# Altium PCB ALio Embedded.PcbDoc (part 2 of 2)
Units mm, origin at the board's own origin, x right, y up, seen from the top; angles counter-clockwise.
Board outline 88.22 x 65.31 mm, 2 copper layers (Top Layer, Bottom Layer); 585 components, 0 nets, 3879 pads, 0 vias.
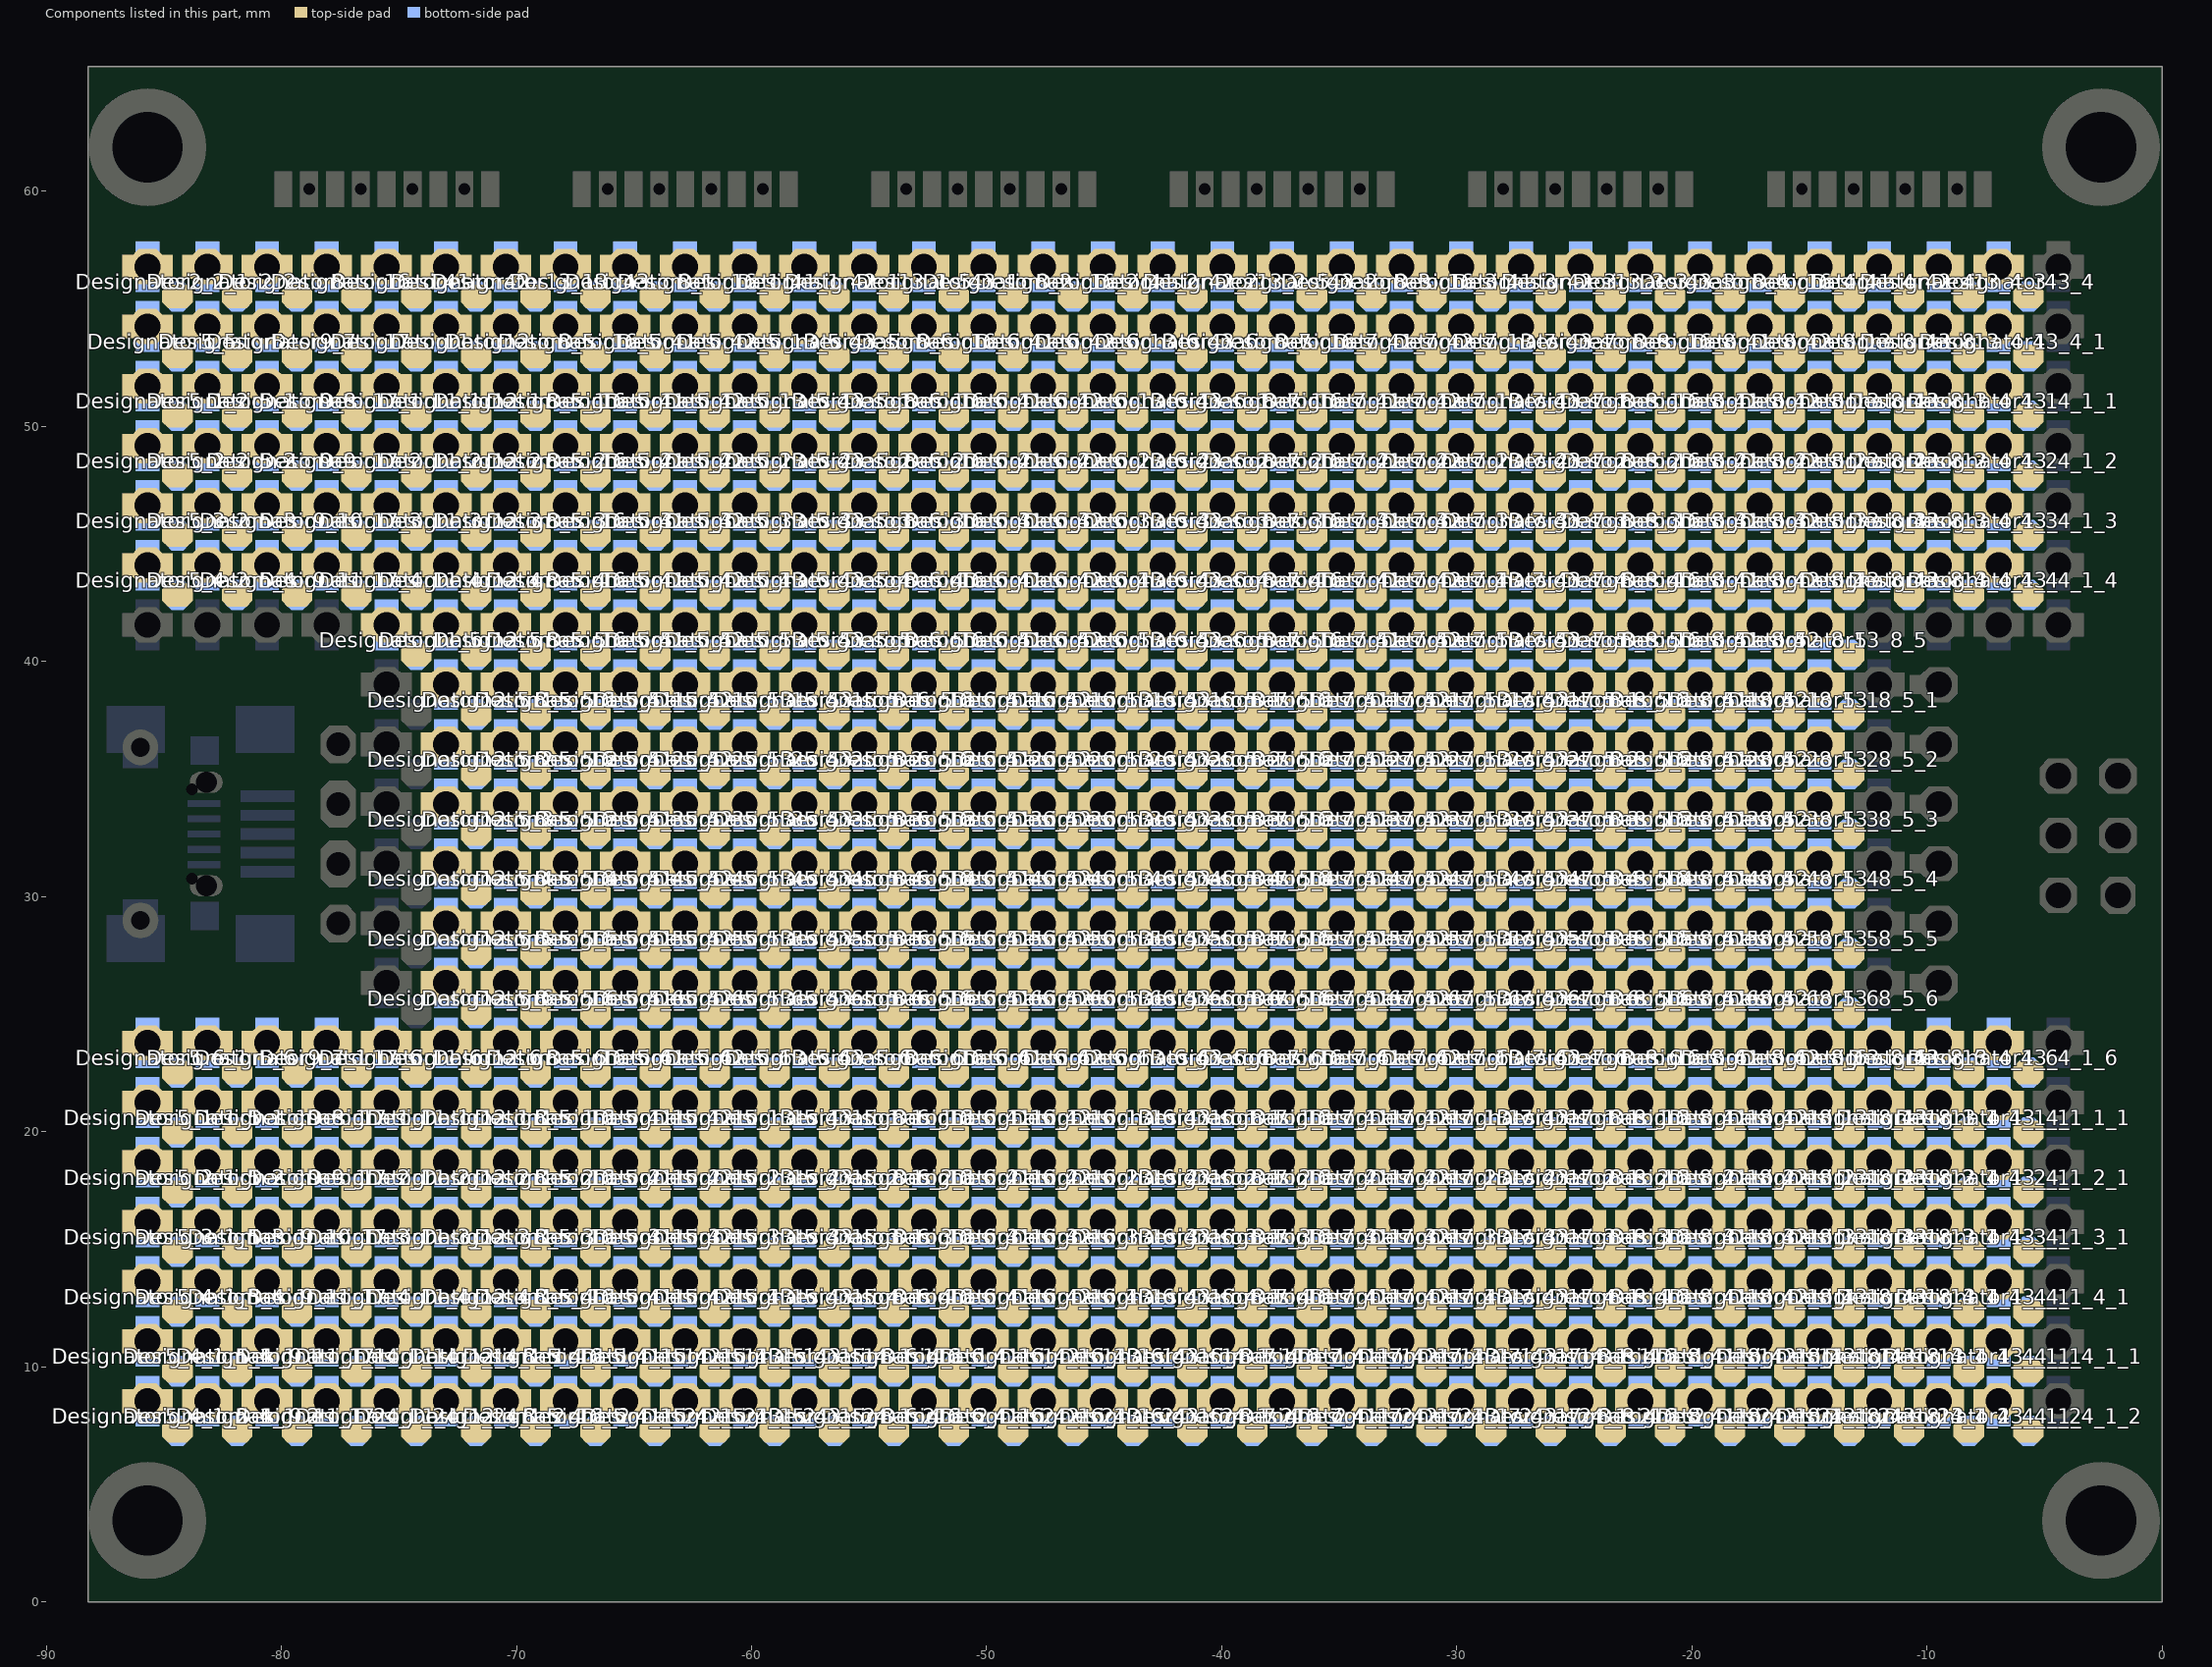
[diagram p2: the components of this part, seen from the top]

## Nets (pads, with @x,y where several pads share a name; then routed paths per layer and width w, separated by ;. In a path a pad name is that pad's centre, name@x,y a point inside that pad or via, vN(x,y) a via of type N, cw(c..) or ccw(c..) an arc to the next point about the centre after c; other vN are vias at no path point)
pads on no net: Designator2_2.1 Designator2_2.2 Designator2_2_1.1 Designator2_2_1.2 Designator5.1 Designator5.2 Designator5_1.1 Designator5_1.2 Designator5_1_1.1 Designator5_1_1.2 Designator5_1_1_1.1 Designator5_1_1_1.2 Designator5_1_2.1 Designator5_1_2.2 Designator5_2.1 Designator5_2.2 Designator5_2_1.1 Designator5_2_1.2 Designator5_2_1_1.1 Designator5_2_1_1.2 Designator5_2_2.1 Designator5_2_2.2 Designator5_3.1 Designator5_3.2 Designator5_3_1.1 Designator5_3_1.2 Designator5_3_1_1.1 Designator5_3_1_1.2 Designator5_3_2.1 Designator5_3_2.2 Designator5_4.1 Designator5_4.2 Designator5_4_1.1 Designator5_4_1.2 Designator5_4_1_1.1 Designator5_4_1_1.2 Designator5_4_1_1_1.1 Designator5_4_1_1_1.2 Designator5_4_1_2.1 Designator5_4_1_2.2 Designator5_4_1_2_1.1 Designator5_4_1_2_1.2 Designator5_4_1_3.1 Designator5_4_1_3.2 Designator5_4_2.1 Designator5_4_2.2 Designator5_5.1 Designator5_5.2 Designator5_6.1 Designator5_6.2 Designator5_6_1.1 Designator5_6_1.2 Designator8.1 Designator8.2 Designator8_1.1 Designator8_1.2 Designator8_2.1 Designator8_2.2 Designator8_3.1 Designator8_3.2 Designator8_4.1 Designator8_4.2 Designator8_5.1 Designator8_5.2 Designator8_5_1.1 Designator8_5_1.2 Designator8_5_1_1.1 Designator8_5_1_1.2 Designator8_5_2.1 Designator8_5_2.2 Designator8_5_2_1.1 Designator8_5_2_1.2 Designator8_5_3.1 Designator8_5_3.2 Designator8_5_3_1.1 Designator8_5_3_1.2 Designator8_5_4.1 Designator8_5_4.2 Designator8_5_4_1.1 Designator8_5_4_1.2 Designator8_5_4_1_1.1 Designator8_5_4_1_1.2 Designator8_5_4_1_2.1 Designator8_5_4_1_2.2 Designator8_5_5.1 Designator8_5_5.2 Designator8_5_5_1.1 Designator8_5_5_1.2 Designator8_5_5_2.1 Designator8_5_5_2.2 Designator8_5_5_3.1 Designator8_5_5_3.2 Designator8_5_5_4.1 Designator8_5_5_4.2 Designator8_5_5_5.1 Designator8_5_5_5.2 Designator8_5_5_6.1 Designator8_5_5_6.2 Designator8_5_6.1 Designator8_5_6.2 Designator8_6.1 Designator8_6.2 Designator8_6_1.1 Designator8_6_1.2 Designator8_6_1_1.1 Designator8_6_1_1.2 Designator8_6_2.1 Designator8_6_2.2 Designator8_6_2_1.1 Designator8_6_2_1.2 Designator8_6_3.1 Designator8_6_3.2 Designator8_6_3_1.1 Designator8_6_3_1.2 Designator8_6_4.1 Designator8_6_4.2 Designator8_6_4_1.1 Designator8_6_4_1.2 Designator8_6_4_1_1.1 Designator8_6_4_1_1.2 Designator8_6_4_1_2.1 Designator8_6_4_1_2.2 Designator8_6_5.1 Designator8_6_5.2 Designator8_6_5_1.1 Designator8_6_5_1.2 Designator8_6_5_2.1 Designator8_6_5_2.2 Designator8_6_5_3.1 Designator8_6_5_3.2 Designator8_6_5_4.1 Designator8_6_5_4.2 Designator8_6_5_5.1 Designator8_6_5_5.2 Designator8_6_5_6.1 Designator8_6_5_6.2 Designator8_6_6.1 Designator8_6_6.2 Designator8_7.1 Designator8_7.2 Designator8_7_1.1 Designator8_7_1.2 Designator8_7_1_1.1 Designator8_7_1_1.2 Designator8_7_2.1 Designator8_7_2.2 Designator8_7_2_1.1 Designator8_7_2_1.2 Designator8_7_3.1 Designator8_7_3.2 Designator8_7_3_1.1 Designator8_7_3_1.2 Designator8_7_4.1 Designator8_7_4.2 Designator8_7_4_1.1 Designator8_7_4_1.2 Designator8_7_4_1_1.1 Designator8_7_4_1_1.2 Designator8_7_4_1_2.1 Designator8_7_4_1_2.2 Designator8_7_5.1 Designator8_7_5.2 Designator8_7_5_1.1 Designator8_7_5_1.2 Designator8_7_5_2.1 Designator8_7_5_2.2 Designator8_7_5_3.1 Designator8_7_5_3.2 Designator8_7_5_4.1 Designator8_7_5_4.2 Designator8_7_5_5.1 Designator8_7_5_5.2 Designator8_7_5_6.1 Designator8_7_5_6.2 Designator8_7_6.1 Designator8_7_6.2 Designator8_8.1 Designator8_8.2 Designator8_8_1.1 Designator8_8_1.2 Designator8_8_1_1.1 Designator8_8_1_1.2 Designator8_8_2.1 Designator8_8_2.2 Designator8_8_2_1.1 Designator8_8_2_1.2 Designator8_8_3.1 Designator8_8_3.2 Designator8_8_3_1.1 Designator8_8_3_1.2 Designator8_8_4.1 Designator8_8_4.2 Designator8_8_4_1.1 Designator8_8_4_1.2 Designator8_8_4_1_1.1 Designator8_8_4_1_1.2 Designator8_8_4_1_2.1 Designator8_8_4_1_2.2 Designator8_8_5.1 Designator8_8_5.2 Designator8_8_5_1.1 Designator8_8_5_1.2 Designator8_8_5_2.1 Designator8_8_5_2.2 Designator8_8_5_3.1 Designator8_8_5_3.2 Designator8_8_5_4.1 Designator8_8_5_4.2 Designator8_8_5_5.1 Designator8_8_5_5.2 Designator8_8_5_6.1 Designator8_8_5_6.2 Designator8_8_6.1 Designator8_8_6.2 Designator9_7.1 Designator9_7.2 Designator9_7_1.1 Designator9_7_1.2 Designator9_8.1 Designator9_8.2 Designator9_8_1.1 Designator9_8_1.2 Designator9_9.1 Designator9_9.2 Designator9_9_1.1 Designator9_9_1.2 Designator9_10.1 Designator9_10.2 Designator9_10_1.1 Designator9_10_1.2 Designator9_11.1 Designator9_11.2 Designator9_11_1.1 Designator9_11_1.2 Designator9_11_1_1.1 Designator9_11_1_1.2 Designator9_11_1_2.1 Designator9_11_1_2.2 Designator11.1 Designator11.2 Designator11_1.1 Designator11_1.2 Designator11_1_1.1 Designator11_1_1.2 Designator11_2.1 Designator11_2.2 Designator11_2_1.1 Designator11_2_1.2 Designator11_3.1 Designator11_3.2 Designator11_3_1.1 Designator11_3_1.2 Designator11_4.1 Designator11_4.2 Designator11_4_1.1 Designator11_4_1.2 Designator11_4_1_1.1 Designator11_4_1_1.2 Designator11_4_1_2.1 Designator11_4_1_2.2 Designator11_5.1 Designator11_5.2 Designator11_6.1 Designator11_6.2 Designator12.1 Designator12.2 Designator12_1.1 Designator12_1.2 Designator12_1_1.1 Designator12_1_1.2 Designator12_2.1 Designator12_2.2 Designator12_2_1.1 Designator12_2_1.2 Designator12_3.1 Designator12_3.2 Designator12_3_1.1 Designator12_3_1.2 Designator12_4.1 Designator12_4.2 Designator12_4_1.1 Designator12_4_1.2 Designator12_4_1_1.1 Designator12_4_1_1.2 Designator12_4_1_2.1 Designator12_4_1_2.2 Designator12_5.1 Designator12_5.2 Designator12_5_1.1 Designator12_5_1.2 Designator12_5_2.1 Designator12_5_2.2 Designator12_5_3.1 Designator12_5_3.2 Designator12_5_4.1 Designator12_5_4.2 Designator12_5_5.1 Designator12_5_5.2 Designator12_5_6.1 Designator12_5_6.2 Designator12_6.1 Designator12_6.2 Designator13_1_5.1 Designator13_1_5.2 Designator13_2_5.1 Designator13_2_5.2 Designator13_3_3.1 Designator13_3_3.2 Designator13_4_1.1 Designator13_4_1.2 Designator13_4_1_1.1 Designator13_4_1_1.2 Designator13_4_1_1_1.1 Designator13_4_1_1_1.2 Designator13_4_1_2.1 Designator13_4_1_2.2 Designator13_4_1_2_1.1 Designator13_4_1_2_1.2 Designator13_4_1_3.1 Designator13_4_1_3.2 Designator13_4_1_3_1.1 Designator13_4_1_3_1.2 Designator13_4_1_4.1 Designator13_4_1_4.2 Designator13_4_1_4_1.1 Designator13_4_1_4_1.2 Designator13_4_1_4_1_1.1 Designator13_4_1_4_1_1.2 Designator13_4_1_4_1_2.1 Designator13_4_1_4_1_2.2 Designator13_4_1_6.1 Designator13_4_1_6.2 Designator13_4_3.1 Designator13_4_3.2 Designator13_5.1 Designator13_5.2 Designator13_5_1.1 Designator13_5_1.2 Designator13_5_1_1.1 Designator13_5_1_1.2 Designator13_5_2.1 Designator13_5_2.2 Designator13_5_2_1.1 Designator13_5_2_1.2 Designator13_5_3.1 Designator13_5_3.2 Designator13_5_3_1.1 Designator13_5_3_1.2 Designator13_5_4.1 Designator13_5_4.2 Designator13_5_4_1.1 Designator13_5_4_1.2 Designator13_5_4_1_1.1 Designator13_5_4_1_1.2 Designator13_5_4_1_2.1 Designator13_5_4_1_2.2 Designator13_5_5.1 Designator13_5_5.2 Designator13_5_5_1.1 Designator13_5_5_1.2 Designator13_5_5_2.1 Designator13_5_5_2.2 Designator13_5_5_3.1 Designator13_5_5_3.2 Designator13_5_5_4.1 Designator13_5_5_4.2 Designator13_5_5_5.1 Designator13_5_5_5.2 Designator13_5_5_6.1 Designator13_5_5_6.2 Designator13_5_6.1 Designator13_5_6.2 Designator13_6.1 Designator13_6.2 Designator13_6_1.1 Designator13_6_1.2 Designator13_6_1_1.1 Designator13_6_1_1.2 Designator13_6_2.1 Designator13_6_2.2 Designator13_6_2_1.1 Designator13_6_2_1.2 Designator13_6_3.1 Designator13_6_3.2 Designator13_6_3_1.1 Designator13_6_3_1.2 Designator13_6_4.1 Designator13_6_4.2 Designator13_6_4_1.1 Designator13_6_4_1.2 Designator13_6_4_1_1.1 Designator13_6_4_1_1.2 Designator13_6_4_1_2.1 Designator13_6_4_1_2.2 Designator13_6_5.1 Designator13_6_5.2 Designator13_6_5_1.1 Designator13_6_5_1.2 Designator13_6_5_2.1 Designator13_6_5_2.2 Designator13_6_5_3.1 Designator13_6_5_3.2 Designator13_6_5_4.1 Designator13_6_5_4.2 Designator13_6_5_5.1 Designator13_6_5_5.2 Designator13_6_5_6.1 Designator13_6_5_6.2 Designator13_6_6.1 Designator13_6_6.2 Designator13_7.1 Designator13_7.2 Designator13_7_1.1 Designator13_7_1.2 Designator13_7_1_1.1 Designator13_7_1_1.2 Designator13_7_2.1 Designator13_7_2.2 Designator13_7_2_1.1 Designator13_7_2_1.2 Designator13_7_3.1 Designator13_7_3.2 Designator13_7_3_1.1 Designator13_7_3_1.2 Designator13_7_4.1 Designator13_7_4.2 Designator13_7_4_1.1 Designator13_7_4_1.2 Designator13_7_4_1_1.1 Designator13_7_4_1_1.2 Designator13_7_4_1_2.1 Designator13_7_4_1_2.2 Designator13_7_5.1 Designator13_7_5.2 Designator13_7_5_1.1 Designator13_7_5_1.2 Designator13_7_5_2.1 Designator13_7_5_2.2 Designator13_7_5_3.1 Designator13_7_5_3.2 Designator13_7_5_4.1 Designator13_7_5_4.2 Designator13_7_5_5.1 Designator13_7_5_5.2 Designator13_7_5_6.1 Designator13_7_5_6.2 Designator13_7_6.1 Designator13_7_6.2 Designator13_8.1 Designator13_8.2 Designator13_8_1.1 Designator13_8_1.2 Designator13_8_1_1.1 Designator13_8_1_1.2 Designator13_8_2.1 Designator13_8_2.2 Designator13_8_2_1.1 Designator13_8_2_1.2 Designator13_8_3.1 Designator13_8_3.2 Designator13_8_3_1.1 Designator13_8_3_1.2 Designator13_8_4.1 Designator13_8_4.2 Designator13_8_4_1.1 Designator13_8_4_1.2 Designator13_8_4_1_1.1 Designator13_8_4_1_1.2 Designator13_8_4_1_2.1 Designator13_8_4_1_2.2 Designator13_8_5.1 Designator13_8_5.2 Designator13_8_5_1.1 Designator13_8_5_1.2 Designator13_8_5_2.1 Designator13_8_5_2.2 Designator13_8_5_3.1 Designator13_8_5_3.2 Designator13_8_5_4.1 Designator13_8_5_4.2 Designator13_8_5_5.1 Designator13_8_5_5.2 Designator13_8_5_6.1 Designator13_8_5_6.2 Designator13_8_6.1 Designator13_8_6.2 Designator13_13.1 Designator13_13.2 Designator16.1 Designator16.2 Designator16_1.1 Designator16_1.2 Designator16_2.1 Designator16_2.2 Designator16_3.1 Designator16_3.2 Designator16_4.1 Designator16_4.2 Designator16_5.1 Designator16_5.2 Designator16_5_1.1 Designator16_5_1.2 Designator16_5_1_1.1 Designator16_5_1_1.2 Designator16_5_2.1 Designator16_5_2.2 Designator16_5_2_1.1 Designator16_5_2_1.2 Designator16_5_3.1 Designator16_5_3.2 Designator16_5_3_1.1 Designator16_5_3_1.2 Designator16_5_4.1 Designator16_5_4.2 Designator16_5_4_1.1 Designator16_5_4_1.2 Designator16_5_4_1_1.1 Designator16_5_4_1_1.2 Designator16_5_4_1_2.1 Designator16_5_4_1_2.2 Designator16_5_5.1 Designator16_5_5.2 Designator16_5_5_1.1 Designator16_5_5_1.2 Designator16_5_5_2.1 Designator16_5_5_2.2 Designator16_5_5_3.1 Designator16_5_5_3.2 Designator16_5_5_4.1 Designator16_5_5_4.2 Designator16_5_5_5.1 Designator16_5_5_5.2 Designator16_5_5_6.1 Designator16_5_5_6.2 Designator16_5_6.1 Designator16_5_6.2 Designator16_6.1 Designator16_6.2 Designator16_6_1.1 Designator16_6_1.2 Designator16_6_1_1.1 Designator16_6_1_1.2 Designator16_6_2.1 Designator16_6_2.2 Designator16_6_2_1.1 Designator16_6_2_1.2 Designator16_6_3.1 Designator16_6_3.2 Designator16_6_3_1.1 Designator16_6_3_1.2 Designator16_6_4.1 Designator16_6_4.2 Designator16_6_4_1.1 Designator16_6_4_1.2 Designator16_6_4_1_1.1 Designator16_6_4_1_1.2 Designator16_6_4_1_2.1 Designator16_6_4_1_2.2 Designator16_6_5.1 Designator16_6_5.2 Designator16_6_5_1.1 Designator16_6_5_1.2 Designator16_6_5_2.1 Designator16_6_5_2.2 Designator16_6_5_3.1 Designator16_6_5_3.2 Designator16_6_5_4.1 Designator16_6_5_4.2 Designator16_6_5_5.1 Designator16_6_5_5.2 Designator16_6_5_6.1 Designator16_6_5_6.2 Designator16_6_6.1 Designator16_6_6.2 Designator16_7.1 Designator16_7.2 Designator16_7_1.1 Designator16_7_1.2 Designator16_7_1_1.1 Designator16_7_1_1.2 Designator16_7_2.1 Designator16_7_2.2 Designator16_7_2_1.1 Designator16_7_2_1.2 Designator16_7_3.1 Designator16_7_3.2 Designator16_7_3_1.1 Designator16_7_3_1.2 Designator16_7_4.1 Designator16_7_4.2 Designator16_7_4_1.1 Designator16_7_4_1.2 Designator16_7_4_1_1.1 Designator16_7_4_1_1.2 Designator16_7_4_1_2.1 Designator16_7_4_1_2.2 Designator16_7_5.1 Designator16_7_5.2 Designator16_7_5_1.1 Designator16_7_5_1.2 Designator16_7_5_2.1 Designator16_7_5_2.2 Designator16_7_5_3.1 Designator16_7_5_3.2 Designator16_7_5_4.1 Designator16_7_5_4.2 Designator16_7_5_5.1 Designator16_7_5_5.2 Designator16_7_5_6.1 Designator16_7_5_6.2 Designator16_7_6.1 Designator16_7_6.2 Designator16_8.1 Designator16_8.2 Designator16_8_1.1 Designator16_8_1.2 Designator16_8_1_1.1 Designator16_8_1_1.2 Designator16_8_2.1 Designator16_8_2.2 Designator16_8_2_1.1 Designator16_8_2_1.2 Designator16_8_3.1 Designator16_8_3.2 Designator16_8_3_1.1 Designator16_8_3_1.2 Designator16_8_4.1 Designator16_8_4.2 Designator16_8_4_1.1 Designator16_8_4_1.2 Designator16_8_4_1_1.1 Designator16_8_4_1_1.2 Designator16_8_4_1_2.1 Designator16_8_4_1_2.2 Designator16_8_5.1 Designator16_8_5.2 Designator16_8_5_1.1 Designator16_8_5_1.2 Designator16_8_5_2.1 Designator16_8_5_2.2 Designator16_8_5_3.1 Designator16_8_5_3.2 Designator16_8_5_4.1 Designator16_8_5_4.2 Designator16_8_5_5.1 Designator16_8_5_5.2 Designator16_8_5_6.1 Designator16_8_5_6.2 Designator16_8_6.1 Designator16_8_6.2 Designator17.1 Designator17.2 Designator17_1.1 Designator17_1.2 Designator17_1_1.1 Designator17_1_1.2 Designator17_2.1 Designator17_2.2 Designator17_2_1.1 Designator17_2_1.2 Designator17_3.1 Designator17_3.2 Designator17_3_1.1 Designator17_3_1.2 Designator17_4.1 Designator17_4.2 Designator17_4_1.1 Designator17_4_1.2 Designator17_4_1_1.1 Designator17_4_1_1.2 Designator17_4_1_2.1 Designator17_4_1_2.2 Designator17_6.1 Designator17_6.2 Designator41.1 Designator41.2 Designator41_1.1 Designator41_1.2 Designator41_2.1 Designator41_2.2 Designator41_3.1 Designator41_3.2 Designator41_4.1 Designator41_4.2 Designator41_5.1 Designator41_5.2 Designator41_5_1.1 Designator41_5_1.2 Designator41_5_1_1.1 Designator41_5_1_1.2 Designator41_5_2.1 Designator41_5_2.2 Designator41_5_2_1.1 Designator41_5_2_1.2 Designator41_5_3.1 Designator41_5_3.2 Designator41_5_3_1.1 Designator41_5_3_1.2 Designator41_5_4.1 Designator41_5_4.2 Designator41_5_4_1.1 Designator41_5_4_1.2 Designator41_5_4_1_1.1 Designator41_5_4_1_1.2 Designator41_5_4_1_2.1 Designator41_5_4_1_2.2 Designator41_5_5.1 Designator41_5_5.2 Designator41_5_5_1.1 Designator41_5_5_1.2 Designator41_5_5_2.1 Designator41_5_5_2.2 Designator41_5_5_3.1 Designator41_5_5_3.2 Designator41_5_5_4.1 Designator41_5_5_4.2 Designator41_5_5_5.1 Designator41_5_5_5.2 Designator41_5_5_6.1 Designator41_5_5_6.2 Designator41_5_6.1 Designator41_5_6.2 Designator41_6.1 Designator41_6.2 Designator41_6_1.1 Designator41_6_1.2 Designator41_6_1_1.1 Designator41_6_1_1.2 Designator41_6_2.1 Designator41_6_2.2 Designator41_6_2_1.1 Designator41_6_2_1.2 Designator41_6_3.1 Designator41_6_3.2 Designator41_6_3_1.1 Designator41_6_3_1.2 Designator41_6_4.1 Designator41_6_4.2 Designator41_6_4_1.1 Designator41_6_4_1.2 Designator41_6_4_1_1.1 Designator41_6_4_1_1.2 Designator41_6_4_1_2.1 Designator41_6_4_1_2.2 Designator41_6_5.1 Designator41_6_5.2 Designator41_6_5_1.1 Designator41_6_5_1.2 Designator41_6_5_2.1 Designator41_6_5_2.2 Designator41_6_5_3.1 Designator41_6_5_3.2 Designator41_6_5_4.1 Designator41_6_5_4.2 Designator41_6_5_5.1 Designator41_6_5_5.2 Designator41_6_5_6.1 Designator41_6_5_6.2 Designator41_6_6.1 Designator41_6_6.2 Designator41_7.1 Designator41_7.2 Designator41_7_1.1 Designator41_7_1.2 Designator41_7_1_1.1 Designator41_7_1_1.2 Designator41_7_2.1 Designator41_7_2.2 Designator41_7_2_1.1 Designator41_7_2_1.2 Designator41_7_3.1 Designator41_7_3.2 Designator41_7_3_1.1 Designator41_7_3_1.2 Designator41_7_4.1 Designator41_7_4.2 Designator41_7_4_1.1 Designator41_7_4_1.2 Designator41_7_4_1_1.1 Designator41_7_4_1_1.2 Designator41_7_4_1_2.1 Designator41_7_4_1_2.2 Designator41_7_5.1 Designator41_7_5.2 Designator41_7_5_1.1 Designator41_7_5_1.2 Designator41_7_5_2.1 Designator41_7_5_2.2 Designator41_7_5_3.1 Designator41_7_5_3.2 Designator41_7_5_4.1 Designator41_7_5_4.2 Designator41_7_5_5.1 Designator41_7_5_5.2 Designator41_7_5_6.1 Designator41_7_5_6.2 Designator41_7_6.1 Designator41_7_6.2 Designator41_8.1 Designator41_8.2 Designator41_8_1.1 Designator41_8_1.2 Designator41_8_1_1.1 Designator41_8_1_1.2 Designator41_8_2.1 Designator41_8_2.2 Designator41_8_2_1.1 Designator41_8_2_1.2 Designator41_8_3.1 Designator41_8_3.2 Designator41_8_3_1.1 Designator41_8_3_1.2 Designator41_8_4.1 Designator41_8_4.2 Designator41_8_4_1.1 Designator41_8_4_1.2 Designator41_8_4_1_1.1 Designator41_8_4_1_1.2 Designator41_8_4_1_2.1 Designator41_8_4_1_2.2 Designator41_8_5.1 Designator41_8_5.2 Designator41_8_5_1.1 Designator41_8_5_1.2 Designator41_8_5_2.1 Designator41_8_5_2.2 Designator41_8_5_3.1 Designator41_8_5_3.2 Designator41_8_5_4.1 Designator41_8_5_4.2 Designator41_8_5_5.1 Designator41_8_5_5.2 Designator41_8_5_6.1 Designator41_8_5_6.2 Designator41_8_6.1 Designator41_8_6.2 Designator42.1 Designator42.2 Designator42_1.1 Designator42_1.2 Designator42_2.1 Designator42_2.2 Designator42_3.1 Designator42_3.2 Designator42_4.1 Designator42_4.2 Designator42_5.1 Designator42_5.2 Designator42_5_1.1 Designator42_5_1.2 Designator42_5_1_1.1 Designator42_5_1_1.2 Designator42_5_2.1 Designator42_5_2.2 Designator42_5_2_1.1 Designator42_5_2_1.2 Designator42_5_3.1 Designator42_5_3.2 Designator42_5_3_1.1 Designator42_5_3_1.2 Designator42_5_4.1 Designator42_5_4.2 Designator42_5_4_1.1 Designator42_5_4_1.2 Designator42_5_4_1_1.1 Designator42_5_4_1_1.2 Designator42_5_4_1_2.1 Designator42_5_4_1_2.2 Designator42_5_5.1 Designator42_5_5.2 Designator42_5_5_1.1 Designator42_5_5_1.2 Designator42_5_5_2.1 Designator42_5_5_2.2 Designator42_5_5_3.1 Designator42_5_5_3.2 Designator42_5_5_4.1 Designator42_5_5_4.2 Designator42_5_5_5.1 Designator42_5_5_5.2 Designator42_5_5_6.1 Designator42_5_5_6.2 Designator42_5_6.1 Designator42_5_6.2 Designator42_6.1 Designator42_6.2 Designator42_6_1.1 Designator42_6_1.2 Designator42_6_1_1.1 Designator42_6_1_1.2 Designator42_6_2.1 Designator42_6_2.2 Designator42_6_2_1.1 Designator42_6_2_1.2 Designator42_6_3.1 Designator42_6_3.2 Designator42_6_3_1.1 Designator42_6_3_1.2 Designator42_6_4.1 Designator42_6_4.2 Designator42_6_4_1.1 Designator42_6_4_1.2 Designator42_6_4_1_1.1 Designator42_6_4_1_1.2 Designator42_6_4_1_2.1 Designator42_6_4_1_2.2 Designator42_6_5.1 Designator42_6_5.2 Designator42_6_5_1.1 Designator42_6_5_1.2 Designator42_6_5_2.1 Designator42_6_5_2.2 Designator42_6_5_3.1 Designator42_6_5_3.2 Designator42_6_5_4.1 Designator42_6_5_4.2 Designator42_6_5_5.1 Designator42_6_5_5.2 Designator42_6_5_6.1 Designator42_6_5_6.2 Designator42_6_6.1 Designator42_6_6.2 Designator42_7.1 Designator42_7.2 Designator42_7_1.1 Designator42_7_1.2 Designator42_7_1_1.1 Designator42_7_1_1.2 Designator42_7_2.1 Designator42_7_2.2 Designator42_7_2_1.1 Designator42_7_2_1.2 Designator42_7_3.1 Designator42_7_3.2 Designator42_7_3_1.1 Designator42_7_3_1.2 Designator42_7_4.1 Designator42_7_4.2 Designator42_7_4_1.1 Designator42_7_4_1.2 Designator42_7_4_1_1.1 Designator42_7_4_1_1.2 Designator42_7_4_1_2.1 Designator42_7_4_1_2.2 Designator42_7_5.1 Designator42_7_5.2 Designator42_7_5_1.1 Designator42_7_5_1.2 Designator42_7_5_2.1 Designator42_7_5_2.2 Designator42_7_5_3.1 Designator42_7_5_3.2 Designator42_7_5_4.1 Designator42_7_5_4.2 Designator42_7_5_5.1 Designator42_7_5_5.2 Designator42_7_5_6.1 Designator42_7_5_6.2 Designator42_7_6.1 Designator42_7_6.2 Designator42_8.1 Designator42_8.2 Designator42_8_1.1 Designator42_8_1.2 Designator42_8_1_1.1 Designator42_8_1_1.2 Designator42_8_2.1 Designator42_8_2.2 Designator42_8_2_1.1 Designator42_8_2_1.2 Designator42_8_3.1 Designator42_8_3.2 Designator42_8_3_1.1 Designator42_8_3_1.2 Designator42_8_4.1 Designator42_8_4.2 Designator42_8_4_1.1 Designator42_8_4_1.2 Designator42_8_4_1_1.1 Designator42_8_4_1_1.2 Designator42_8_4_1_2.1 Designator42_8_4_1_2.2 Designator42_8_5.1 Designator42_8_5.2 Designator42_8_5_1.1 Designator42_8_5_1.2 Designator42_8_5_2.1 Designator42_8_5_2.2 Designator42_8_5_3.1 Designator42_8_5_3.2 Designator42_8_5_4.1 Designator42_8_5_4.2 Designator42_8_5_5.1 Designator42_8_5_5.2 Designator42_8_5_6.1 Designator42_8_5_6.2 Designator42_8_6.1 Designator42_8_6.2 Designator43.1 Designator43.2 Designator43_1.1 Designator43_1.2 Designator43_2.1 Designator43_2.2 Designator43_3.1 Designator43_3.2 Designator43_4.1 Designator43_4.2 Designator43_4_1.1 Designator43_4_1.2 Designator43_4_1_1.1 Designator43_4_1_1.2 Designator43_4_1_1_1.1 Designator43_4_1_1_1.2 Designator43_4_1_2.1 Designator43_4_1_2.2 Designator43_4_1_2_1.1 Designator43_4_1_2_1.2 Designator43_4_1_3.1 Designator43_4_1_3.2 Designator43_4_1_3_1.1 Designator43_4_1_3_1.2 Designator43_4_1_4.1 Designator43_4_1_4.2 Designator43_4_1_4_1.1 Designator43_4_1_4_1.2 Designator43_4_1_4_1_1.1 Designator43_4_1_4_1_1.2 Designator43_4_1_4_1_2.1 Designator43_4_1_4_1_2.2 Designator43_4_1_6.1 Designator43_4_1_6.2 Designator43_5.1 Designator43_5.2 Designator43_5_1.1 Designator43_5_1.2 Designator43_5_1_1.1 Designator43_5_1_1.2 Designator43_5_2.1 Designator43_5_2.2 Designator43_5_2_1.1 Designator43_5_2_1.2 Designator43_5_3.1 Designator43_5_3.2 Designator43_5_3_1.1 Designator43_5_3_1.2 Designator43_5_4.1 Designator43_5_4.2 Designator43_5_4_1.1 Designator43_5_4_1.2 Designator43_5_4_1_1.1 Designator43_5_4_1_1.2 Designator43_5_4_1_2.1 Designator43_5_4_1_2.2 Designator43_5_5.1 Designator43_5_5.2 Designator43_5_5_1.1 Designator43_5_5_1.2 Designator43_5_5_2.1 Designator43_5_5_2.2 Designator43_5_5_3.1 Designator43_5_5_3.2 Designator43_5_5_4.1 Designator43_5_5_4.2 Designator43_5_5_5.1 Designator43_5_5_5.2 Designator43_5_5_6.1 Designator43_5_5_6.2 Designator43_5_6.1 Designator43_5_6.2 Designator43_6.1 Designator43_6.2 Designator43_6_1.1 Designator43_6_1.2 Designator43_6_1_1.1 Designator43_6_1_1.2 Designator43_6_2.1 Designator43_6_2.2 Designator43_6_2_1.1 Designator43_6_2_1.2 Designator43_6_3.1 Designator43_6_3.2 Designator43_6_3_1.1 Designator43_6_3_1.2 Designator43_6_4.1 Designator43_6_4.2 Designator43_6_4_1.1 Designator43_6_4_1.2 Designator43_6_4_1_1.1 Designator43_6_4_1_1.2 Designator43_6_4_1_2.1 Designator43_6_4_1_2.2 Designator43_6_5.1 Designator43_6_5.2 Designator43_6_5_1.1 Designator43_6_5_1.2 Designator43_6_5_2.1 Designator43_6_5_2.2 Designator43_6_5_3.1 Designator43_6_5_3.2 Designator43_6_5_4.1 Designator43_6_5_4.2 Designator43_6_5_5.1 Designator43_6_5_5.2 Designator43_6_5_6.1 Designator43_6_5_6.2 Designator43_6_6.1 Designator43_6_6.2 Designator43_7.1 Designator43_7.2 Designator43_7_1.1 Designator43_7_1.2 Designator43_7_1_1.1 Designator43_7_1_1.2 Designator43_7_2.1 Designator43_7_2.2 Designator43_7_2_1.1 Designator43_7_2_1.2 Designator43_7_3.1 Designator43_7_3.2 Designator43_7_3_1.1 Designator43_7_3_1.2 Designator43_7_4.1 Designator43_7_4.2 Designator43_7_4_1.1 Designator43_7_4_1.2 Designator43_7_4_1_1.1 Designator43_7_4_1_1.2 Designator43_7_4_1_2.1 Designator43_7_4_1_2.2 Designator43_7_5.1 Designator43_7_5.2 Designator43_7_5_1.1 Designator43_7_5_1.2 Designator43_7_5_2.1 Designator43_7_5_2.2 Designator43_7_5_3.1 Designator43_7_5_3.2 Designator43_7_5_4.1 Designator43_7_5_4.2 Designator43_7_5_5.1 Designator43_7_5_5.2 Designator43_7_5_6.1 Designator43_7_5_6.2 Designator43_7_6.1 Designator43_7_6.2 Designator43_8.1 Designator43_8.2 Designator43_8_1.1 Designator43_8_1.2 Designator43_8_1_1.1 Designator43_8_1_1.2 Designator43_8_2.1 Designator43_8_2.2 Designator43_8_2_1.1 Designator43_8_2_1.2 Designator43_8_3.1 Designator43_8_3.2 Designator43_8_3_1.1 Designator43_8_3_1.2 Designator43_8_4.1 Designator43_8_4.2 Designator43_8_4_1.1 Designator43_8_4_1.2 Designator43_8_4_1_1.1 Designator43_8_4_1_1.2 Designator43_8_4_1_2.1 Designator43_8_4_1_2.2 Designator43_8_6.1 Designator43_8_6.2
copper on no net: | length 408.4
  Top Layer w0.254: -80.615,56.8 -80.615,59.431 -79.946,60.1 ; -78.075,56.8 -77.746,57.129 -77.746,60.1 ; -75.535,56.8 -75.535,60.089 ; -75.529,60.1 -75.518,60.089 ; -73.346,57.151 -72.995,56.8 ; -73.324,57.129 -73.324,60.1 ; -71.124,60.1 -70.455,59.431 -70.455,56.8 ; -67.915,56.8 -67.915,59.431 -67.246,60.1 ; -65.375,56.8 -65.046,57.129 -65.046,60.1 ; -62.835,56.8 -62.835,60.089 ; -62.829,60.1 -62.818,60.089 ; -60.646,57.151 -60.295,56.8 ; -60.624,57.129 -60.624,60.1 ; -58.424,60.1 -57.755,59.431 -57.755,56.8 ; -55.215,56.8 -55.215,59.431 -54.546,60.1 ; -52.675,56.8 -52.346,57.129 -52.346,60.1 ; -50.135,56.8 -50.135,60.089 ; -50.129,60.1 -50.118,60.089 ; -47.946,57.151 -47.595,56.8 ; -47.924,57.129 -47.924,60.1 ; -45.724,60.1 -45.055,59.431 -45.055,56.8 ; -42.515,56.8 -42.515,59.431 -41.846,60.1 ; -39.975,56.8 -39.646,57.129 -39.646,60.1 ; -37.435,56.8 -37.435,60.089 ; -37.429,60.1 -37.418,60.089 ; -35.246,57.151 -34.895,56.8 ; -35.224,57.129 -35.224,60.1 ; -33.024,60.1 -32.355,59.431 -32.355,56.8 ; -29.815,56.8 -29.815,59.431 -29.146,60.1 ; -27.275,56.8 -26.946,57.129 -26.946,60.1 ; -24.735,56.8 -24.735,60.089 ; -24.729,60.1 -24.718,60.089 ; -22.546,57.151 -22.195,56.8 ; -22.524,57.129 -22.524,60.1 ; -20.324,60.1 -19.655,59.431 -19.655,56.8 ; -17.115,56.8 -17.115,59.431 -16.446,60.1 ; -14.575,56.8 -14.246,57.129 -14.246,60.1 ; -12.035,56.8 -12.035,60.089 ; -12.029,60.1 -12.018,60.089 ; -9.846,57.151 -9.495,56.8 ; -9.824,57.129 -9.824,60.1 ; -7.624,60.1 -6.955,59.431 -6.955,56.8
  Top Layer w0.33: -6.168,33.864 -3.145,33.864
  Top Layer w0.356: -3.145,33.864 -1.875,32.594
  Top Layer w0.381: -75.713,25.05 -74.692,25.05 ; -75.713,27.59 -74.692,27.59 ; -75.713,30.13 -74.692,30.13 ; -75.713,32.67 -74.692,32.67 ; -75.713,35.21 -74.692,35.21 ; -75.713,37.75 -74.692,37.75 ; -9.495,26.32 -2.739,26.32 -2.561,26.498 -1.875,27.184 -1.875,30.054 ; -9.495,28.86 -5.609,28.86 -4.415,30.054 ; -9.495,31.4 -6.828,31.4 -6.65,31.578 -5.634,32.594 -4.415,32.594 ; -9.495,33.94 -9.419,33.864 -6.168,33.864 ; -9.495,36.48 -5.761,36.48 -4.415,35.134 ; -9.495,39.02 -3.653,39.02 -2.713,38.08 -1.875,37.242 -1.875,35.134
  Bottom Layer w0.254: -83.301,31.36 -82.366,31.36 -82.063,31.057 -80.6,31.057 ; -83.301,32.01 -82.195,32.01 -82.074,31.889 -80.631,31.889 ; -83.301,32.66 -80.608,32.66 ; -83.301,33.31 -82.195,33.31 -82.074,33.431 -80.631,33.431 -80.6,33.463 ; -83.301,33.96 -82.366,33.96 -82.063,34.263 -80.6,34.263 -79.794,34.263 -77.578,36.478 ; -80.615,56.8 -80.615,59.431 -79.946,60.1 ; -80.6,31.063 -79.783,31.063 -77.578,28.858 ; -80.6,31.863 -78.043,31.863 -77.578,31.398 ; -80.6,32.663 -78.854,32.663 -77.578,33.938 ; -79.345,55.53 -79.345,58.07 -78.824,58.591 -78.824,60.1 ; -78.075,56.8 -77.724,57.151 ; -77.746,57.129 -77.746,60.1 ; -76.805,55.53 -76.805,58.07 -76.624,58.251 -76.624,60.1 ; -75.535,56.8 -75.535,60.089 ; -75.529,60.089 -75.518,60.1 ; -74.424,60.1 -74.424,58.229 -74.265,58.07 -74.265,55.53 ; -73.324,60.1 -73.324,57.129 -72.995,56.8 ; -72.224,60.1 -72.224,58.569 -71.725,58.07 -71.725,55.53 ; -71.124,60.1 -70.455,59.431 -70.455,56.8 ; -67.915,56.8 -67.915,59.431 -67.246,60.1 ; -66.645,55.53 -66.645,58.07 -66.124,58.591 -66.124,60.1 ; -65.375,56.8 -65.024,57.151 ; -65.046,57.129 -65.046,60.1 ; -64.105,55.53 -64.105,58.07 -63.924,58.251 -63.924,60.1 ; -62.835,56.8 -62.835,60.089 ; -62.829,60.089 -62.818,60.1 ; -61.724,60.1 -61.724,58.229 -61.565,58.07 -61.565,55.53 ; -60.624,60.1 -60.624,57.129 -60.295,56.8 ; -59.524,60.1 -59.524,58.569 -59.025,58.07 -59.025,55.53 ; -58.424,60.1 -57.755,59.431 -57.755,56.8 ; -55.215,56.8 -55.215,59.431 -54.546,60.1 ; -53.945,55.53 -53.945,58.07 -53.424,58.591 -53.424,60.1 ; -52.675,56.8 -52.324,57.151 ; -52.346,57.129 -52.346,60.1 ; -51.405,55.53 -51.405,58.07 -51.224,58.251 -51.224,60.1 ; -50.135,56.8 -50.135,60.089 ; -50.129,60.089 -50.118,60.1 ; -49.024,60.1 -49.024,58.229 -48.865,58.07 -48.865,55.53 ; -47.924,60.1 -47.924,57.129 -47.595,56.8 ; -46.824,60.1 -46.824,58.569 -46.325,58.07 -46.325,55.53 ; -45.724,60.1 -45.055,59.431 -45.055,56.8 ; -42.515,56.8 -42.515,59.431 -41.846,60.1 ; -41.245,55.53 -41.245,58.07 -40.724,58.591 -40.724,60.1 ; -39.975,56.8 -39.624,57.151 ; -39.646,57.129 -39.646,60.1 ; -38.705,55.53 -38.705,58.07 -38.524,58.251 -38.524,60.1 ; -37.435,56.8 -37.435,60.089 ; -37.429,60.089 -37.418,60.1 ; -36.324,60.1 -36.324,58.229 -36.165,58.07 -36.165,55.53 ; -35.224,60.1 -35.224,57.129 -34.895,56.8 ; -34.124,60.1 -34.124,58.569 -33.625,58.07 -33.625,55.53 ; -33.024,60.1 -32.355,59.431 -32.355,56.8 ; -29.815,56.8 -29.815,59.431 -29.146,60.1 ; -28.545,55.53 -28.545,58.07 -28.024,58.591 -28.024,60.1 ; -27.275,56.8 -26.924,57.151 ; -26.946,57.129 -26.946,60.1 ; -26.005,55.53 -26.005,58.07 -25.824,58.251 -25.824,60.1 ; -24.735,56.8 -24.735,60.089 ; -24.729,60.089 -24.718,60.1 ; -23.624,60.1 -23.624,58.229 -23.465,58.07 -23.465,55.53 ; -22.524,60.1 -22.524,57.129 -22.195,56.8 ; -21.424,60.1 -21.424,58.569 -20.925,58.07 -20.925,55.53 ; -20.324,60.1 -19.655,59.431 -19.655,56.8 ; -17.115,56.8 -17.115,59.431 -16.446,60.1 ; -15.845,55.53 -15.845,58.07 -15.324,58.591 -15.324,60.1 ; -14.575,56.8 -14.224,57.151 ; -14.246,57.129 -14.246,60.1 ; -13.305,55.53 -13.305,58.07 -13.124,58.251 -13.124,60.1 ; -12.035,56.8 -12.035,60.089 ; -12.029,60.089 -12.018,60.1 ; -10.924,60.1 -10.924,58.229 -10.765,58.07 -10.765,55.53 ; -9.824,60.1 -9.824,57.129 -9.495,56.8 ; -8.724,60.1 -8.724,58.569 -8.225,58.07 -8.225,55.53 ; -7.624,60.1 -6.955,59.431 -6.955,56.8 ; -80.608,32.66 -80.6,32.668 -80.608,32.66
  Bottom Layer w0.381: -74.265,25.477 -74.265,26.498 ; -74.265,28.017 -74.265,29.038 ; -74.265,30.557 -74.265,31.578 ; -74.265,33.097 -74.265,34.118 ; -74.265,35.637 -74.265,36.658 ; -74.265,38.177 -74.265,39.198

## Polygon pours and split planes (outlines as drawn)
no net on Top Solder "Bottom Solder-No Net" (solid): -45.42,4.203 -41.338,4.203 cw(c-41.338,3.857) -40.991,3.857 -40.991,1.066 cw(c-41.269,1.066) -41.269,0.789 -45.434,0.789 cw(c-45.434,1.097) -45.743,1.097 -45.743,3.879 cw(c-45.419,3.879) -45.419,4.203
no net on Bottom Solder "Bottom Solder-No Net" (solid): -35.214,4.203 -39.296,4.203 ccw(c-39.296,3.857) -39.643,3.857 -39.643,1.066 ccw(c-39.365,1.066) -39.365,0.789 -35.2,0.789 ccw(c-35.2,1.097) -34.891,1.097 -34.891,3.879 ccw(c-35.215,3.879) -35.215,4.203

## Keep-outs
Keep-Out Layer:
  lines w0.127: -88.221,0 0,0 0,65.31 -88.221,65.31 -88.221,0

## Other copper
Top Layer:
  rectangle: -75.91,24.86 -75.713,25.08
  rectangle: -75.91,25.02 -75.713,25.241
  rectangle: -75.91,27.4 -75.713,27.62
  rectangle: -75.91,27.56 -75.713,27.781
  rectangle: -75.91,29.94 -75.713,30.16
  rectangle: -75.91,30.1 -75.713,30.321
  rectangle: -75.91,32.48 -75.713,32.7
  rectangle: -75.91,32.64 -75.713,32.861
  rectangle: -75.91,35.02 -75.713,35.24
  rectangle: -75.91,35.18 -75.713,35.401
  rectangle: -75.91,37.56 -75.713,37.78
  rectangle: -75.91,37.72 -75.713,37.941
  region: -68.913,61.776 -69.457,61.776 -69.457,59.198 -68.913,59.198
  region: -56.213,61.776 -56.757,61.776 -56.757,59.198 -56.213,59.198
  region: -43.513,61.776 -44.057,61.776 -44.057,59.198 -43.513,59.198
  region: -30.813,61.776 -31.357,61.776 -31.357,59.198 -30.813,59.198
  region: -18.113,61.776 -18.657,61.776 -18.657,59.198 -18.113,59.198
  region: 531 vertices and 0 holes, not listed, extent -45.503,1.511 -44.177,3.829
  region: 507 vertices and 1 holes, not listed, extent -40.653,2.208 -39.22,3.775
  region: 292 vertices and 1 holes, not listed, extent -39.072,2.208 -37.693,3.775
  region: 527 vertices and 1 holes, not listed, extent -37.907,2.221 -36.527,3.775
  region: 526 vertices and 1 holes, not listed, extent -36.393,2.208 -34.919,3.775
  region: 791 vertices and 0 holes, not listed, extent -45.181,1.096 -41.229,3.882
  region: 565 vertices and 1 holes, not listed, extent -45.731,0.801 -41.002,4.191
  text "T" at -2.854,57.373 h2.26 r270
  text "S" at -2.83,54.836 h2.26 r270
  text "R" at -2.854,52.358 h2.26 r270
  text "Q" at -2.744,49.886 h2.26 r270
  text "P" at -2.854,47.193 h2.26 r270
  text "O" at -1.38,43.407 h2.26 r90
  text "N" at -2.854,42.131 h2.26 r270
  text "G" at -79.102,35.827 h2.4 r90
  text "D+" at -79.079,32.784 h2.4 r90
  text "D-" at -79.079,30.441 h2.4 r90
  text "V" at -79.079,28.215 h2.4 r90
  text "G" at -2.83,24.45 h2.26 r270
  text "F" at -2.854,21.729 h2.26 r270
  text "E" at -2.854,19.241 h2.26 r270
  text "D" at -2.854,16.758 h2.26 r270
  text "C" at -2.83,14.26 h2.26 r270
  text "B" at -2.854,11.627 h2.26 r270
  text "A" at -2.854,9.217 h2.26 r270
  text "32" at -83.788,6.69 h2 r270
  text "31" at -81.248,6.69 h2 r270
  text "30" at -78.708,6.69 h2 r270
  text "29" at -76.168,6.69 h2 r270
  text "28" at -73.628,6.69 h2 r270
  text "27" at -71.099,6.69 h2 r270
  text "26" at -68.548,6.69 h2 r270
  text "25" at -66.008,6.69 h2 r270
  text "24" at -63.479,6.69 h2 r270
  text "23" at -60.928,6.69 h2 r270
  text "22" at -58.399,6.69 h2 r270
  text "21" at -55.859,6.69 h2 r270
  text "20" at -53.308,6.69 h2 r270
  text "19" at -50.768,6.69 h2 r270
  text "18" at -48.228,6.69 h2 r270
  text "17" at -45.699,6.69 h2 r270
  text "16" at -43.148,6.69 h2 r270
  text "15" at -40.608,6.69 h2 r270
  text "14" at -38.079,6.69 h2 r270
  text "13" at -35.528,6.69 h2 r270
  text "12" at -32.999,6.69 h2 r270
  text "11" at -30.459,6.69 h2 r270
  text "10" at -27.908,6.69 h2 r270
  text "9" at -25.368,6.69 h2 r270
  text "8" at -22.828,6.69 h2 r270
  text "7" at -20.288,6.69 h2 r270
  text "6" at -17.748,6.69 h2 r270
  text "5" at -15.195,6.69 h2 r270
  text "4" at -12.675,6.69 h2 r270
  text "3" at -10.128,6.69 h2 r270
  text "2" at -7.599,6.69 h2 r270
  text "1" at -5.074,6.69 h2 r270
  text "More info at CrowdSupply.com" at -79.713,1.853 h2.54
  text "ALio Proto Board" at -29.515,1.641 h2.54
Bottom Layer:
  rectangle: -86.751,31.409 -85.251,33.909
  rectangle: -11,25.92 -10.534,26.719
  rectangle: -11,28.46 -10.534,29.259
  rectangle: -11,31 -10.534,31.799
  rectangle: -11,33.54 -10.534,34.339
  rectangle: -11,36.08 -10.534,36.879
  rectangle: -11,38.62 -10.534,39.419
  region: -74.456,26.695 -74.456,26.498 -74.235,26.498 -74.235,26.695
  region: -74.295,26.695 -74.295,26.498 -74.075,26.498 -74.075,26.695
  region: -74.456,29.235 -74.456,29.038 -74.235,29.038 -74.235,29.235
  region: -74.295,29.235 -74.295,29.038 -74.075,29.038 -74.075,29.235
  region: -74.456,31.775 -74.456,31.578 -74.235,31.578 -74.235,31.775
  region: -74.295,31.775 -74.295,31.578 -74.075,31.578 -74.075,31.775
  region: -74.456,34.315 -74.456,34.118 -74.235,34.118 -74.235,34.315
  region: -74.295,34.315 -74.295,34.118 -74.075,34.118 -74.075,34.315
  region: -74.456,36.855 -74.456,36.658 -74.235,36.658 -74.235,36.855
  region: -74.295,36.855 -74.295,36.658 -74.075,36.658 -74.075,36.855
  region: -74.456,39.395 -74.456,39.198 -74.235,39.198 -74.235,39.395
  region: -74.295,39.395 -74.295,39.198 -74.075,39.198 -74.075,39.395
  rectangle: -69.457,59.198 -68.913,61.776
  rectangle: -56.757,59.198 -56.213,61.776
  rectangle: -44.057,59.198 -43.513,61.776
  rectangle: -31.357,59.198 -30.813,61.776
  rectangle: -18.657,59.198 -18.113,61.776
  region: 565 vertices and 1 holes, not listed, extent -39.629,0.801 -34.9,4.191
  region: 791 vertices and 0 holes, not listed, extent -39.401,1.096 -35.449,3.882
  region: 526 vertices and 1 holes, not listed, extent -45.711,2.208 -44.238,3.775
  region: 527 vertices and 1 holes, not listed, extent -44.104,2.221 -42.724,3.775
  region: 292 vertices and 1 holes, not listed, extent -42.938,2.208 -41.558,3.775
  region: 507 vertices and 1 holes, not listed, extent -41.411,2.208 -39.977,3.775
  region: 531 vertices and 0 holes, not listed, extent -36.454,1.511 -35.128,3.829
  text "T" at -2.854,56.227 h2.26 r270
  text "S" at -2.83,53.684 h2.26 r270
  text "R" at -2.854,51.082 h2.26 r270
  text "Q" at -2.744,48.474 h2.26 r270
  text "P" at -2.854,46.087 h2.26 r270
  text "O" at -2.83,43.407 h2.26 r270
  text "N" at -2.854,40.989 h2.26 r270
  text "G" at -8.005,38.35 h2.26 r270
  text "R" at -8.005,35.842 h2.26 r270
  text "Mo" at -7.993,32.647 h2.26 r270
  text "S" at -8.005,30.824 h2.26 r270
  text "Mi" at -8.005,27.935 h2.26 r270
  text "V" at -8.005,25.659 h2.26 r270
  text "G" at -2.83,23.11 h2.26 r270
  text "F" at -2.854,20.751 h2.26 r270
  text "E" at -2.854,18.159 h2.26 r270
  text "D" at -2.854,15.562 h2.26 r270
  text "C" at -2.83,12.98 h2.26 r270
  text "B" at -2.854,10.533 h2.26 r270
  text "A" at -2.854,7.863 h2.26 r270
  text "31" at -81.248,4.94 h2 r270
  text "30" at -78.708,4.94 h2 r270
  text "29" at -76.168,4.94 h2 r270
  text "28" at -73.628,4.94 h2 r270
  text "27" at -71.099,4.94 h2 r270
  text "26" at -68.548,4.94 h2 r270
  text "25" at -66.008,4.94 h2 r270
  text "24" at -63.479,4.94 h2 r270
  text "23" at -60.928,4.94 h2 r270
  text "22" at -58.399,4.94 h2 r270
  text "21" at -55.859,4.94 h2 r270
  text "20" at -53.308,4.94 h2 r270
  text "19" at -50.768,4.94 h2 r270
  text "18" at -48.228,4.94 h2 r270
  text "17" at -45.699,4.94 h2 r270
  text "16" at -43.148,4.94 h2 r270
  text "15" at -40.608,4.94 h2 r270
  text "14" at -38.079,4.94 h2 r270
  text "13" at -35.528,4.94 h2 r270
  text "12" at -32.999,4.94 h2 r270
  text "11" at -30.459,4.94 h2 r270
  text "10" at -27.908,4.94 h2 r270
  text "9" at -25.368,4.94 h2 r270
  text "8" at -22.828,4.94 h2 r270
  text "7" at -20.288,4.94 h2 r270
  text "6" at -17.748,4.94 h2 r270
  text "5" at -15.195,4.94 h2 r270
  text "4" at -12.675,4.94 h2 r270
  text "3" at -10.128,4.94 h2 r270
  text "2" at -7.599,4.932 h2 r270

## Silkscreen, mask and mechanical layers (free items; w line width, h text height)
Bottom Overlay:
  circle w0.25: c-78.9,31.063 r0.125
  lines w0.008: -84.101,31.06 -83.502,31.06
  lines w0.2: -84.55,27.713 -82.35,27.713 ; -84.55,37.613 -82.35,37.613 ; -79.55,29.613 -79.55,30.413 ; -79.55,34.913 -79.55,35.713 ; -5.685,31.535 -5.685,36.404 ; -5.685,36.404 -5.685,28.784 -0.605,28.784 -0.605,36.404 -5.685,36.404
  text "T" at -2.854,56.227 h2.26 r270
  text "S" at -2.83,53.684 h2.26 r270
  text "R" at -2.854,51.082 h2.26 r270
  text "Q" at -2.744,48.474 h2.26 r270
  text "P" at -2.854,46.087 h2.26 r270
  text "O" at -2.83,43.407 h2.26 r270
  text "N" at -2.854,40.989 h2.26 r270
  text "G" at -77.1,39.225 h2.4 r90
  text "G" at -8.005,38.35 h2.26 r270
  text "5" at -4.933,37.26 h1.27 r270
  text "6" at -2.383,37.26 h1.27 r270
  text "R" at -8.005,35.842 h2.26 r270
  text "Mo" at -7.993,32.647 h2.26 r270
  text "S" at -8.005,30.824 h2.26 r270
  text "Mi" at -8.005,27.935 h2.26 r270
  text "V" at -77.1,27.53 h2.4 r90
  text "1" at -4.933,27.42 h1.27 r270
  text "2" at -2.383,26.91 h1.27 r270
  text "V" at -8.005,25.659 h2.26 r270
  text "G" at -2.83,23.11 h2.26 r270
  text "F" at -2.854,20.751 h2.26 r270
  text "E" at -2.854,18.159 h2.26 r270
  text "D" at -2.854,15.562 h2.26 r270
  text "C" at -2.83,12.98 h2.26 r270
  text "B" at -2.854,10.533 h2.26 r270
  text "A" at -2.854,7.863 h2.26 r270
  text "1" at -5.061,5.922 h2 r270
  text "32" at -83.788,4.94 h2 r270
  text "31" at -81.248,4.94 h2 r270
  text "30" at -78.708,4.94 h2 r270
  text "29" at -76.168,4.94 h2 r270
  text "28" at -73.628,4.94 h2 r270
  text "27" at -71.099,4.94 h2 r270
  text "26" at -68.548,4.94 h2 r270
  text "25" at -66.008,4.94 h2 r270
  text "24" at -63.479,4.94 h2 r270
  text "23" at -60.928,4.94 h2 r270
  text "22" at -58.399,4.94 h2 r270
  text "21" at -55.859,4.94 h2 r270
  text "20" at -53.308,4.94 h2 r270
  text "19" at -50.768,4.94 h2 r270
  text "18" at -48.228,4.94 h2 r270
  text "17" at -45.699,4.94 h2 r270
  text "16" at -43.148,4.94 h2 r270
  text "15" at -40.608,4.94 h2 r270
  text "14" at -38.079,4.94 h2 r270
  text "13" at -35.528,4.94 h2 r270
  text "12" at -32.999,4.94 h2 r270
  text "11" at -30.459,4.94 h2 r270
  text "10" at -27.908,4.94 h2 r270
  text "9" at -25.368,4.94 h2 r270
  text "8" at -22.828,4.94 h2 r270
  text "7" at -20.288,4.94 h2 r270
  text "6" at -17.748,4.94 h2 r270
  text "5" at -15.195,4.94 h2 r270
  text "4" at -12.675,4.94 h2 r270
  text "3" at -10.128,4.94 h2 r270
  text "2" at -7.599,4.932 h2 r270
  text "More info at CrowdSupply.com" at -48.936,1.853 h2.54
  text "ALio Proto Board" at -12.363,1.641 h2.54
Top Paste:
  rectangle: -75.91,25.02 -75.713,25.241
  rectangle: -75.91,24.86 -75.713,25.08
  rectangle: -75.91,27.56 -75.713,27.781
  rectangle: -75.91,27.4 -75.713,27.62
  rectangle: -75.91,30.1 -75.713,30.321
  rectangle: -75.91,29.94 -75.713,30.16
  rectangle: -75.91,32.64 -75.713,32.861
  rectangle: -75.91,32.48 -75.713,32.7
  rectangle: -75.91,35.18 -75.713,35.401
  rectangle: -75.91,35.02 -75.713,35.24
  rectangle: -75.91,37.72 -75.713,37.941
  rectangle: -75.91,37.56 -75.713,37.78
  lines w0.381: -75.713,25.05 -74.692,25.05 ; -75.713,27.59 -74.692,27.59 ; -75.713,30.13 -74.692,30.13 ; -75.713,32.67 -74.692,32.67 ; -75.713,35.21 -74.692,35.21 ; -75.713,37.75 -74.692,37.75 ; -74.265,25.477 -74.265,26.498 ; -74.265,28.017 -74.265,29.038 ; -74.265,30.557 -74.265,31.578 ; -74.265,33.097 -74.265,34.118 ; -74.265,35.637 -74.265,36.658 ; -74.265,38.177 -74.265,39.198
Bottom Paste:
  rectangle: -86.751,31.409 -85.251,33.909
  region: -74.295,26.695 -74.295,26.498 -74.075,26.498 -74.075,26.695
  region: -74.456,26.695 -74.456,26.498 -74.235,26.498 -74.235,26.695
  region: -74.295,29.235 -74.295,29.038 -74.075,29.038 -74.075,29.235
  region: -74.456,29.235 -74.456,29.038 -74.235,29.038 -74.235,29.235
  region: -74.295,31.775 -74.295,31.578 -74.075,31.578 -74.075,31.775
  region: -74.456,31.775 -74.456,31.578 -74.235,31.578 -74.235,31.775
  region: -74.295,34.315 -74.295,34.118 -74.075,34.118 -74.075,34.315
  region: -74.456,34.315 -74.456,34.118 -74.235,34.118 -74.235,34.315
  region: -74.295,36.855 -74.295,36.658 -74.075,36.658 -74.075,36.855
  region: -74.456,36.855 -74.456,36.658 -74.235,36.658 -74.235,36.855
  region: -74.295,39.395 -74.295,39.198 -74.075,39.198 -74.075,39.395
  region: -74.456,39.395 -74.456,39.198 -74.235,39.198 -74.235,39.395
  lines w0.381: -74.265,25.477 -74.265,26.498 ; -74.265,28.017 -74.265,29.038 ; -74.265,30.557 -74.265,31.578 ; -74.265,33.097 -74.265,34.118 ; -74.265,35.637 -74.265,36.658 ; -74.265,38.177 -74.265,39.198
Top Solder:
  region: -18.135,61.776 -18.68,61.776 -18.68,59.198 -18.135,59.198
  region: -30.835,61.776 -31.38,61.776 -31.38,59.198 -30.835,59.198
  region: -43.535,61.776 -44.08,61.776 -44.08,59.198 -43.535,59.198
  region: -56.235,61.776 -56.78,61.776 -56.78,59.198 -56.235,59.198
  region: -68.935,61.776 -69.48,61.776 -69.48,59.198 -68.935,59.198
  rectangle: -5.033,7.057 -3.763,24.402
  rectangle: -75.91,25.02 -75.713,25.241
  rectangle: -75.91,24.86 -75.713,25.08
  rectangle: -75.91,27.56 -75.713,27.781
  rectangle: -75.91,27.4 -75.713,27.62
  rectangle: -75.91,30.1 -75.713,30.321
  rectangle: -75.91,29.94 -75.713,30.16
  rectangle: -75.91,32.64 -75.713,32.861
  rectangle: -75.91,32.48 -75.713,32.7
  rectangle: -75.91,35.18 -75.713,35.401
  rectangle: -75.91,35.02 -75.713,35.24
  rectangle: -75.91,37.72 -75.713,37.941
  rectangle: -75.91,37.56 -75.713,37.78
  rectangle: -77.203,27.955 -76.123,37.38
  region: -4.875,24.402 -86.317,24.402 -86.317,7.057 -4.875,7.057
  region: -4.95,57.436 -86.33,57.436 -86.33,40.919 -4.95,40.919
  rectangle: -76.153,24.172 -10.599,41.021
  rectangle: -5.033,40.919 -3.763,57.422
  lines w0.381: -75.713,25.05 -74.692,25.05 ; -75.713,27.59 -74.692,27.59 ; -75.713,30.13 -74.692,30.13 ; -75.713,32.67 -74.692,32.67 ; -75.713,35.21 -74.692,35.21 ; -75.713,37.75 -74.692,37.75
  text "T" at -2.854,57.373 h2.26 r270
  text "S" at -2.83,54.836 h2.26 r270
  text "R" at -2.854,52.358 h2.26 r270
  text "Q" at -2.744,49.886 h2.26 r270
  text "P" at -2.854,47.193 h2.26 r270
  text "O" at -2.83,44.793 h2.26 r270
  text "N" at -2.854,42.131 h2.26 r270
  text "G" at -79.102,35.827 h2.4 r90
  text "D+" at -79.079,32.784 h2.4 r90
  text "D-" at -79.079,30.441 h2.4 r90
  text "V" at -79.079,28.215 h2.4 r90
  text "G" at -2.83,24.45 h2.26 r270
  text "F" at -2.854,21.729 h2.26 r270
  text "E" at -2.854,19.241 h2.26 r270
  text "D" at -2.854,16.758 h2.26 r270
  text "C" at -2.83,14.26 h2.26 r270
  text "B" at -2.854,11.627 h2.26 r270
  text "A" at -2.854,9.217 h2.26 r270
  text "32" at -83.788,6.69 h2 r270
  text "31" at -81.248,6.69 h2 r270
  text "30" at -78.708,6.69 h2 r270
  text "29" at -76.168,6.69 h2 r270
  text "28" at -73.628,6.69 h2 r270
  text "27" at -71.099,6.69 h2 r270
  text "26" at -68.548,6.69 h2 r270
  text "25" at -66.008,6.69 h2 r270
  text "24" at -63.479,6.69 h2 r270
  text "23" at -60.928,6.69 h2 r270
  text "22" at -58.399,6.69 h2 r270
  text "21" at -55.859,6.69 h2 r270
  text "20" at -53.308,6.69 h2 r270
  text "19" at -50.768,6.69 h2 r270
  text "18" at -48.228,6.69 h2 r270
  text "17" at -45.699,6.69 h2 r270
  text "16" at -43.148,6.69 h2 r270
  text "15" at -40.608,6.69 h2 r270
  text "14" at -38.079,6.69 h2 r270
  text "13" at -35.528,6.69 h2 r270
  text "12" at -32.999,6.69 h2 r270
  text "11" at -30.459,6.69 h2 r270
  text "10" at -27.908,6.69 h2 r270
  text "9" at -25.368,6.69 h2 r270
  text "8" at -22.828,6.69 h2 r270
  text "7" at -20.288,6.69 h2 r270
  text "6" at -17.748,6.69 h2 r270
  text "5" at -15.195,6.69 h2 r270
  text "4" at -12.675,6.69 h2 r270
  text "3" at -10.128,6.69 h2 r270
  text "2" at -7.599,6.69 h2 r270
  text "1" at -5.074,6.69 h2 r270
  text "More info at CrowdSupply.com" at -79.713,1.853 h2.54
  text "ALio Proto Board" at -29.515,1.641 h2.54
Bottom Solder:
  rectangle: -86.851,31.309 -85.151,34.009
  rectangle: -5.033,42.193 -3.763,57.255
  rectangle: -18.68,59.198 -18.135,61.776
  rectangle: -31.38,59.198 -30.835,61.776
  rectangle: -44.08,59.198 -43.535,61.776
  rectangle: -56.78,59.198 -56.235,61.776
  rectangle: -69.48,59.198 -68.935,61.776
  rectangle: -5.033,9.173 -3.763,24.235
  region: -74.295,26.695 -74.295,26.498 -74.075,26.498 -74.075,26.695
  region: -74.456,26.695 -74.456,26.498 -74.235,26.498 -74.235,26.695
  region: -74.295,29.235 -74.295,29.038 -74.075,29.038 -74.075,29.235
  region: -74.456,29.235 -74.456,29.038 -74.235,29.038 -74.235,29.235
  region: -74.295,31.775 -74.295,31.578 -74.075,31.578 -74.075,31.775
  region: -74.456,31.775 -74.456,31.578 -74.235,31.578 -74.235,31.775
  region: -74.295,34.315 -74.295,34.118 -74.075,34.118 -74.075,34.315
  region: -74.456,34.315 -74.456,34.118 -74.235,34.118 -74.235,34.315
  region: -74.295,36.855 -74.295,36.658 -74.075,36.658 -74.075,36.855
  region: -74.456,36.855 -74.456,36.658 -74.235,36.658 -74.235,36.855
  region: -74.295,39.395 -74.295,39.198 -74.075,39.198 -74.075,39.395
  region: -74.456,39.395 -74.456,39.198 -74.235,39.198 -74.235,39.395
  rectangle: -77.203,27.955 -76.123,37.38
  region: -5.025,24.404 -86.31,24.404 -86.31,7.27 -5.025,7.27
  region: -5.025,57.437 -86.324,57.437 -86.324,40.914 -5.025,40.914
  rectangle: -76.153,24.222 -10.599,41.108
  lines w0.381: -74.265,25.477 -74.265,26.498 ; -74.265,28.017 -74.265,29.038 ; -74.265,30.557 -74.265,31.578 ; -74.265,33.097 -74.265,34.118 ; -74.265,35.637 -74.265,36.658 ; -74.265,38.177 -74.265,39.198
Mechanical 2:
  lines w0.127: -88.151,28.76 -88.151,36.56 -83.151,36.56 -83.151,28.76 -88.151,28.76

## Dimensions
-88.221,65.31 to 0,65.31 on Mechanical 13
0.063,65.355 to 0.063,0.045 on Mechanical 13